# Altium PCB PCB1.PcbDoc
Units mm, origin at the board's own origin, x right, y up, seen from the top; angles counter-clockwise.
Board outline 69.98 x 45.09 mm, 2 copper layers (Top Layer, Bottom Layer); 39 components, 25 nets, 121 pads, 26 vias.
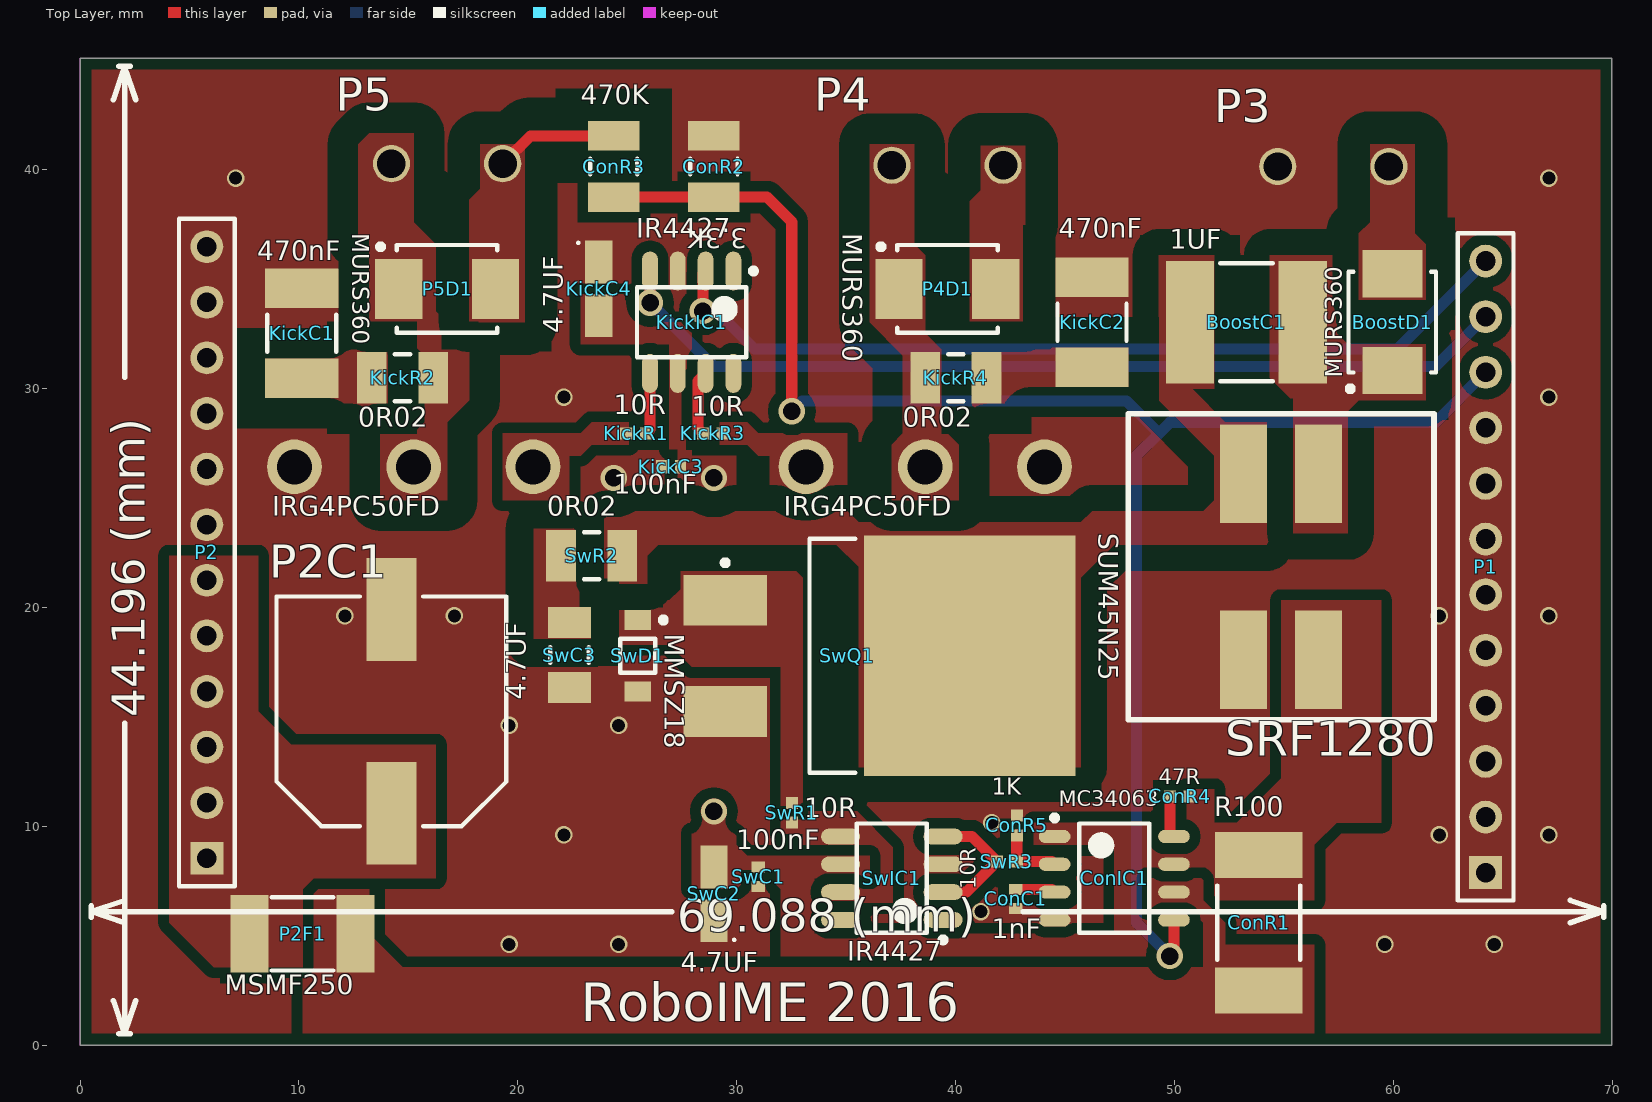
[diagram p0: Top Layer view]
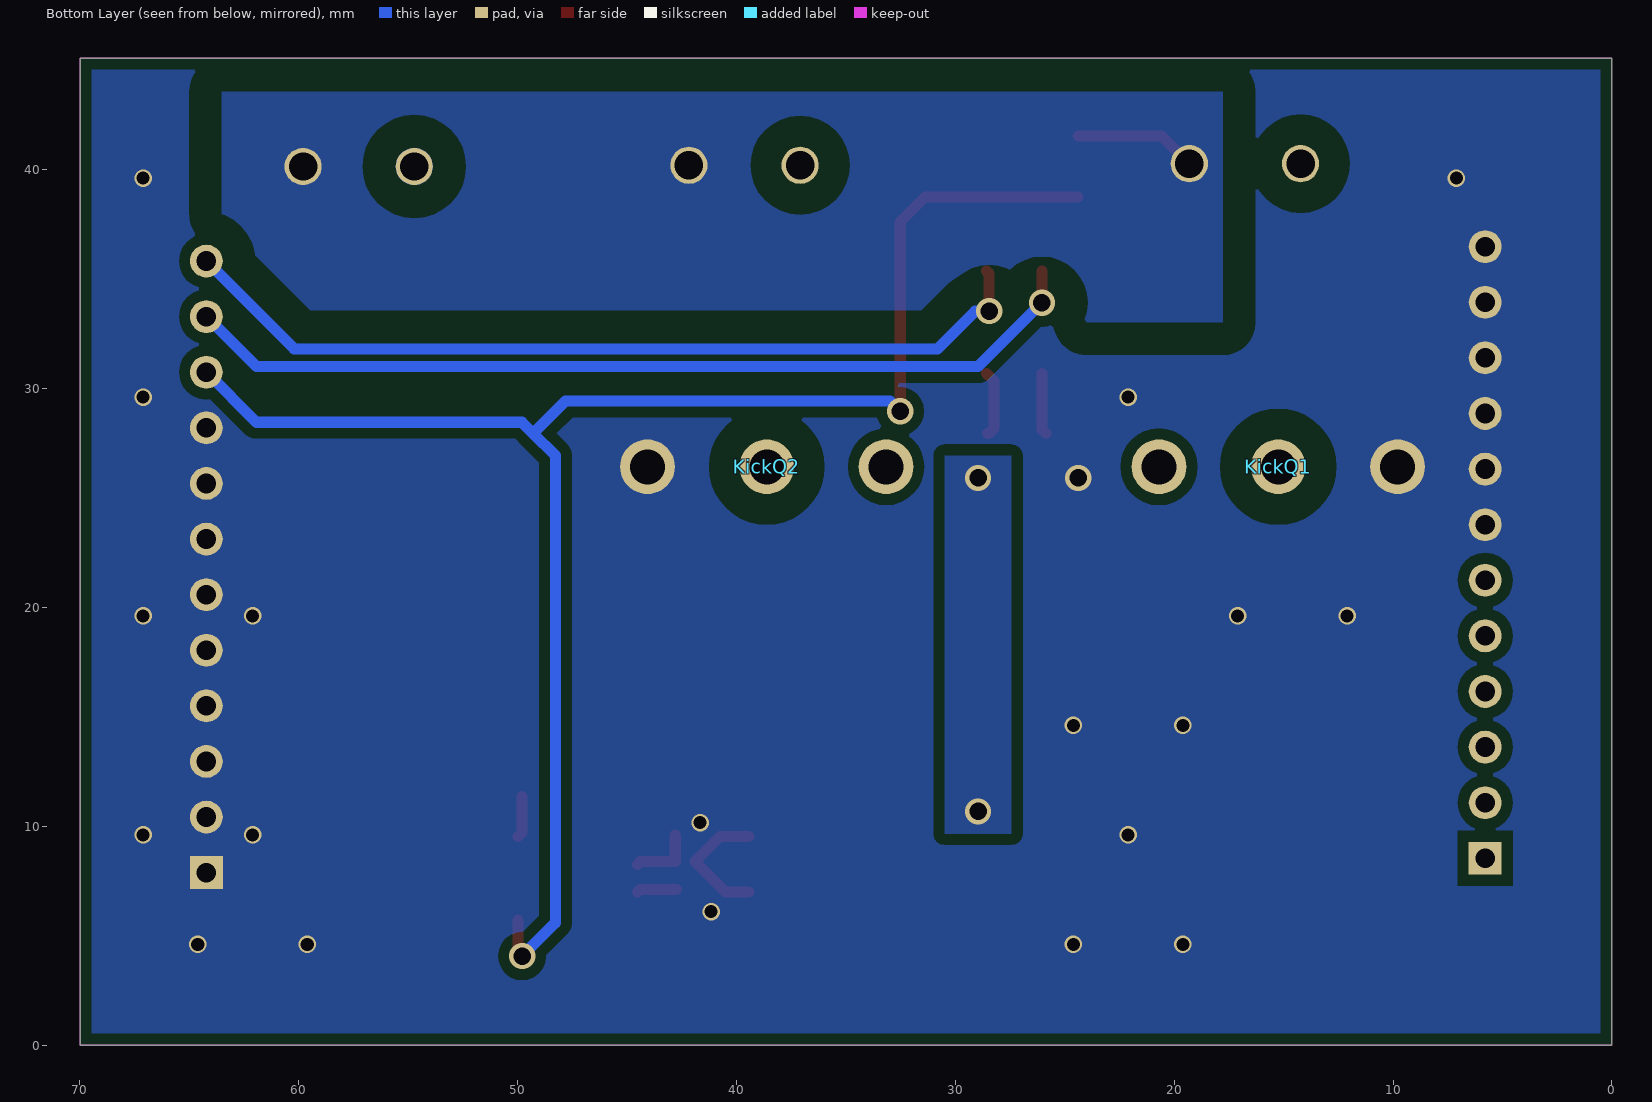
[diagram p1: Bottom Layer view, seen from below]

## Layer stack, top to bottom
Top Solder: solder mask 0.0102, Solder Resist, Dk 3.5
Top Layer: signal copper 0.0356
Dielectric 1: dielectric 0.32, FR-4, Dk 4.8
Bottom Layer: signal copper 0.0356
Bottom Solder: solder mask 0.0102, Solder Resist, Dk 3.5

## Board outline
0,0 69.977,0 69.977,45.085 0,45.085

## Design rules (kind name [scope] priority, off if disabled: settings)
Clearance Clearance_9 [InNet('KICK_REF')] p1: gap=0.5 ignorepadtopadclearanceinfootprint=FALSE except(0: Arc-Hole Track-Hole SMDPad-Hole THPad-Hole Via-Hole Fill-Hole Poly-Hole Region-Hole Text-Hole)
Clearance Clearance_8 [InNet('NetKickC2_2')] p2: gap=1.4 ignorepadtopadclearanceinfootprint=FALSE except(0: Arc-Hole Track-Hole SMDPad-Hole THPad-Hole Via-Hole Fill-Hole Poly-Hole Region-Hole Text-Hole)
Clearance Clearance_7 [InNet('NetKickC1_2')] p3: gap=1.4 ignorepadtopadclearanceinfootprint=FALSE except(0: Arc-Hole Track-Hole SMDPad-Hole THPad-Hole Via-Hole Fill-Hole Poly-Hole Region-Hole Text-Hole)
Clearance Clearance_6 [InNet('CHIP_KICK-')] p4: gap=1.4 ignorepadtopadclearanceinfootprint=FALSE except(0: Arc-Hole Track-Hole SMDPad-Hole THPad-Hole Via-Hole Fill-Hole Poly-Hole Region-Hole Text-Hole)
Clearance Clearance_5 [InNet('KICK-')] p5: gap=1.4 ignorepadtopadclearanceinfootprint=FALSE except(0: Arc-Hole Track-Hole SMDPad-Hole THPad-Hole Via-Hole Fill-Hole Poly-Hole Region-Hole Text-Hole)
Clearance Clearance_4 [InNet('NetSwC3_2')] p6: gap=1.3 ignorepadtopadclearanceinfootprint=FALSE except(0: Arc-Hole Track-Hole SMDPad-Hole THPad-Hole Via-Hole Fill-Hole Poly-Hole Region-Hole Text-Hole)
Clearance Clearance_3 [InNet('NetBoostC1_1')] p7: gap=1.2 ignorepadtopadclearanceinfootprint=FALSE except(0: Arc-Hole Track-Hole SMDPad-Hole THPad-Hole Via-Hole Fill-Hole Poly-Hole Region-Hole Text-Hole)
Clearance Clearance_2 [InNet('SEPIC')] p8: gap=1.2 ignorepadtopadclearanceinfootprint=FALSE except(0: Arc-Hole Track-Hole SMDPad-Hole THPad-Hole Via-Hole Fill-Hole Poly-Hole Region-Hole Text-Hole)
Clearance [InNet('CAP+')] p9: gap=1.5 ignorepadtopadclearanceinfootprint=FALSE except(0: Arc-Hole Track-Hole SMDPad-Hole THPad-Hole Via-Hole Fill-Hole Poly-Hole Region-Hole Text-Hole)
Clearance Clearance_1 [All] p10: gap=0.3 ignorepadtopadclearanceinfootprint=FALSE except(0: Arc-Hole Track-Hole SMDPad-Hole THPad-Hole Via-Hole Fill-Hole Poly-Hole Region-Hole Text-Hole; 0.5: Arc-Poly Track-Poly SMDPad-Poly THPad-Poly Via-Poly Fill-Poly Poly-Poly Poly-Region Poly-Text)
MinimumSolderMaskSliver [All] p1 off: minsoldermaskwidth=0.254
PolygonConnect PolygonConnect_1 [InNetClass('DIRECT')] p1: connectstyle=Direct reliefconductorwidth=0.254 reliefentries=4 polygonreliefangle="90 Angle" airgapwidth=0.254
PolygonConnect [All] p2: connectstyle=Direct reliefconductorwidth=0.508 reliefentries=4 polygonreliefangle="90 Angle" airgapwidth=0.3
RoutingVias [All] p1: holewidth=0.711 width=1.27 viastyle="Through Hole" minholewidth=0.711 minwidth=1.27 maxholewidth=0.711 maxwidth=1.27
SilkToSilkClearance [All] p1 off: silktosilkclearance=0.254
SilkToSolderMaskClearance [IsPad] p1 off: minsilkscreentomaskgap=0.254 clearancetoexposedcopper=TRUE
SolderMaskExpansion [All] p1: expansion=0.102
Width [All] p1: maxlimit=0.762 minlimit=0.254 preferedwidth=0.508
27 further rules are at their usual default settings.

## Classes and differential pairs
net class DIRECT: CAP+ CHIP_KICK- GND KICK- NetBoostC1_1 NetP2_1 NetSwC3_2 SEPIC V+ VIN

## Components (designator, comment, footprint, x,y, rotation, side; value= is the part's Value field where it differs from the comment)
BoostC1 "1UF" CAP-2220 53.28,33.02 r0 top
BoostD1 "MURS360" ONSC-SMB-2-403A-03_V 59.944,33.02 r90 top
ConC1 "1nF" CAP-0402 42.74,6.672 r90 top
ConIC1 "MC34063" SOIC8-STM 47.244,7.62 r0 top
ConR1 "R100" "RES-2512 BOURNS CRA" 53.848,5.588 r270 top
ConR2 "3.3K" RES-1206 28.956,40.132 r270 top
ConR3 "470K" RES-1206 24.384,40.132 r90 top
ConR4 "47R" RES-0402 50.234,11.354 r0 top
ConR5 "1K" RES-0402 42.79,10.031 r270 top
KickC1 "470nF" "CAP-1812 TDK" 10.128,32.512 r270 top
KickC2 "470nF" "CAP-1812 TDK" 46.228,33.02 r270 top
KickC3 "100nF" CAP-0402 26.992,26.416 r0 top
KickC4 "4.7UF" "CAP Tant 1206 Kemet" 23.686,34.544 r90 top
KickIC1 "IR4427" SOIC8-INFINEON 27.94,33.02 r270 top
KickQ1 "IRG4PC50FD" TO-247AC 15.24,26.416 r180 bottom
KickQ2 "IRG4PC50FD" TO-247AC 38.608,26.416 r0 bottom
KickR1 "10R" RES-0402 25.4,27.94 r180 top
KickR2 "0R02" RES-1206 14.732,30.48 r0 top
KickR3 "10R" RES-0402 28.898,27.94 r0 top
KickR4 "0R02" RES-1206 40.008,30.48 r180 top
P1 "Header 12" HDR1X12 64.21,7.874 r90 top
P2 "Header 12" HDR1X12 5.79,8.53 r90 top
P2C1 "EEE-FK1C681GP" "Cap Al Size G - Panasonic" 14.224,15.24 r90 top
P2F1 "MSMF250" "1812-MSMF Bourns2" 10.16,5.08 r0 top
P3 "Cap" "Term Block 2P" 57.252,40.132 r0 top
P4 "OSTTA024163" "Term Block 2P" 39.624,40.189 r0 top
P4D1 "MURS360" ONSC-SMB-2-403A-03_V 39.624,34.544 r0 top
P5 "OSTTA024163" "Term Block 2P" 16.764,40.263 r0 top
P5D1 "MURS360" ONSC-SMB-2-403A-03_V 16.764,34.544 r0 top
SRF1280 "SRF1280-100M" SRF1280-100M-PCB 54.864,21.844 r180 top
SwC1 "100nF" CAP-0402 30.988,7.688 r90 top
SwC2 "4.7UF" "CAP Tant 1206 Kemet" 28.956,6.903 r270 top
SwC3 "4.7UF" "CAP-1206 KEMET" 22.352,17.814 r90 top
SwD1 "MMSZ18" ONSC-SOD-123-2-425-04_V 25.481,17.78 r270 top
SwIC1 "IR4427" SOIC8-INFINEON 37.084,7.62 r180 top
SwQ1 "SUM45N25" "TO-263 Vishay" 35.72,17.78 r0 top
SwR1 "10R" RES-0402 32.512,10.61 r90 top
SwR2 "0R02" RES-1206 23.368,22.352 r0 top
SwR3 "10R" RES-0402 42.34,8.376 r180 top

## Footprints (in the part's own frame and the unit in brackets; to place one, negate y for a bottom-side part, rotate by r counter-clockwise, add the part's x,y. Pads: shape width x height; smd on the part's side, far side on the other; paste and mask are expansions set on the pad)
"1812-MSMF Bourns2" [mm] "Chip Diode, 2-Leads, Body 4,60x3,24mm, IPC Medium Density"
  rect 1.73x3.55 smd: 1(-2.415,0) 2(2.415,0)
  silkscreen extent -1.4,-1.68 1.4,1.68, body extent -2.3,-1.62 2.3,1.62, height 1.15
"Cap Al Size G - Panasonic" [mm] "Aluminum Electrolytic Capacitor, Body 10,30x10,30x10,50mm, IPC Low Density"
  rect 4.7x2.3 smd: 1(-4.65,0) 2(4.65,0)
  silkscreen extent -5.25,-5.25 5.25,5.25, body extent -5.65,-5.21 5.65,5.09, height 10.41
"CAP Tant 1206 Kemet" [mm] "Molded Capacitor, 2-Leads, Body 3,20x1,60mm, IPC Medium Density"
  rect 1.95x1.25 smd: 1(-1.225,0) 2(1.225,0)
  silkscreen extent 2.05,0.87 2.15,0.97, body extent -1.7,-0.9 1.7,0.9, height 1.8
CAP-0402 [mm]
  rect 0.5x0.62 smd: 1(-0.44,0) 2(0.44,0)
  body extent -0.53,-0.28 0.53,0.27, height 0.55
"CAP-1206 KEMET" [mm] "Chip Resistor, 2-Leads, Body 3,20x1,60mm, IPC Medium Density"
  rect 1.42x1.96 smd: 1(-1.49,0) 2(1.49,0)
  silkscreen extent -0.35,-0.88 0.35,0.88, body extent -1.7,-0.9 1.7,0.9, height 1.75
"CAP-1812 TDK" [mm] "Chip Capacitor, 2-Leads, Body 4,60x3,20mm, IPC Medium Density"
  rect 1.8x3.35 smd: 1(-2.05,0) 2(2.05,0)
  silkscreen extent -0.85,-1.58 0.85,1.58, body extent -2.3,-1.6 2.3,1.6, height 3.2
CAP-2220 [mm] "Chip Capacitor, 2-Leads, Body 5,75x5,00mm, IPC Medium Density"
  rect 2.2x5.6 smd: 1(-2.575,0) 2(2.575,0)
  silkscreen extent -1.2,-2.7 1.2,2.7, body extent -3.1,-2.7 3.1,2.7, height 2.5
HDR1X12 [mm] "Connector; Header; 12 Position"
  rect 1.5x1.5 hole 0.9: 1(0,0)
  round 1.5 hole 0.9: 2(2.54,0) 3(5.08,0) 4(7.62,0) 5(10.16,0) 6(12.7,0) 7(15.24,0) 8(17.78,0) 9(20.32,0) 10(22.86,0) 11(25.4,0) 12(27.94,0)
  silkscreen extent -1.27,-1.27 29.21,1.27
ONSC-SMB-2-403A-03_V [mm] "Molded, 2-Leads, Body 4.6x3.95mm"
  rect 2.159x2.743 smd: 1(-2.21,0) 2(2.21,0)
  silkscreen extent -3.16,-2 2.3,2.05, body extent -2.3,-1.97 2.3,1.97, height 2.47
ONSC-SOD-123-2-425-04_V [mm] "SOD, 2-Leads, Body 2.69x1.6mm"
  rect 0.91x1.22 smd: 1(-1.635,0) 2(1.635,0)
  silkscreen extent -1.76,-0.8 0.78,1.29, body extent -1.35,-0.8 1.35,0.8, height 1.35
RES-0402 [mm]
  rect 0.55x0.55 smd: 1(-0.45,0) 2(0.45,0)
  body extent -0.53,-0.27 0.53,0.28, height 0.4
RES-1206 [mm]
  rect 1.35x2.35 smd: 1(-1.4,0) 2(1.4,0)
  silkscreen extent -0.35,-1.08 0.35,1.07, body extent -1.73,-0.67 1.73,0.67, height 0.45
"RES-2512 BOURNS CRA" [mm] "Chip Resistor, 2-Leads, Body 6,45x3,35mm, IPC Medium Density"
  rect 2.1x4 smd: 1(-3.1,0) 2(3.1,0)
  silkscreen extent -1.7,-1.9 1.7,1.9, body extent -3.32,-1.57 3.33,1.58, height 0.9
SOIC8-INFINEON [mm] "SOIC, 8-Leads, Body 4,89x3,90mm, Pitch 1,27mm, IPC Medium Density"
  oval 1.78x0.72 smd: 1(-2.34,1.905) 2(-2.34,0.635) 3(-2.34,-0.635) 4(-2.34,-1.905) 5(2.34,-1.905) 6(2.34,-0.635) 7(2.34,0.635) 8(2.34,1.905)
  silkscreen extent -2.46,-2.5 1.6,2.94, body extent -2,-2.5 2,2.5, height 1.75
SOIC8-STM [mm] "SOIC, 8-Leads, Body 4,90x3,90mm, Pitch 1,27mm, IPC Medium Density"
  oval 1.45x0.6 smd: 1(-2.725,1.905) 2(-2.725,0.635) 3(-2.725,-0.635) 4(-2.725,-1.905) 5(2.725,-1.905) 6(2.725,-0.635) 7(2.725,0.635) 8(2.725,1.905)
  silkscreen extent -2.85,-2.5 1.6,2.88, body extent -2,-2.5 2,2.5, height 1.75
SRF1280-100M-PCB [mm]
  rect 2.15x4.5 smd: 1(1.715,4.25) 2(-1.715,4.25) 3(-1.715,-4.25) 4(1.715,-4.25)
  silkscreen extent -6.99,-6.99 6.99,6.99, body extent -6.25,-6.12 6.25,6.38, height 7.8
"Term Block 2P" [mm]
  round 1.7 hole 1.3: 1(-2.54,0) 2(2.54,0)
  body extent -5.64,-3.1 4.96,4.5, height 10
TO-247AC [mm]
  round 2.5 hole 1.6: 1(-5.45,0) 2(0,0) 3(5.45,0)
  body extent -7.75,-24.89 7.75,0.51, height 8
"TO-263 Vishay" [mm] "D2-PAK, 3-Pads, Body 7,93x8,69mm (max), IPC Medium Density"
  rect 3.81x2.32 smd: 1(-6.25,2.54) 3(-6.25,-2.54)
  rect 9.65x11 smd: 2(4.92,0)
  silkscreen extent -6.37,-5.35 -0.31,5.35, body extent -6.5,-4.91 8.09,4.91, height 4.22

## Part data
BoostC1: library part "Cap 1UF 2220 450V", "1µF 450V Ceramic Capacitor X7T 2220 (5750 Metric) 0.224\" L x 0.197\" W (5.70mm x 5.00mm)"
BoostD1 P4D1 P5D1: library part CMP-0902-00327-1, "Surface Mount Ultrafast Power Rectifier, 2-Pin SMB, Pb-Free, Tape and Reel"
ConC1: library part "Cap 1nF 0402", "1000pF 50V Ceramic Capacitor X7R 0402 (1005 Metric) 0.039\" L x 0.020\" W (1.00mm x 0.50mm)"
ConIC1: library part MC34063ACD, "Buck, Boost Switching Regulator IC Positive or Negative Adjustable 1.25V 1 Output 1.5A (Switch) 8-SOIC (0.154\", 3.90mm Width)"
ConR1: library part "RES 0R1 2512", "RES SMD 0.1 OHM 1% 3W 2512"
ConR2: library part "RES 3.3K 1206", "RES SMD 3.3K OHM 5% 1/4W 1206"
ConR3: library part "RES 470K 1206", "RES SMD 470K OHM 1% 1/4W 1206"
ConR4: library part "RES 47 0402", "RES SMD 47 OHM 5% 1/16W 0402"
ConR5: library part "RES 1K 0402", "RES SMD 1K OHM 5% 1/16W 0402"
KickC1 KickC2: library part "Cap 470nF 250V 1812", "0.47µF 250V Ceramic Capacitor X7R 1812 (4532 Metric) 0.177\" L x 0.126\" W (4.50mm x 3.20mm)"
KickC3 SwC1: library part "Cap 100nF 0402", "0.10µF 16V Ceramic Capacitor X7R 0402 (1005 Metric) 0.039\" L x 0.020\" W (1.00mm x 0.50mm)"
KickC4 SwC2: library part "Cap Tant 4,7UF 1206", "4.7µF Molded Tantalum Capacitors 25V 1206 (3216 Metric) 6 Ohm 0.126\" L x 0.063\" W (3.20mm x 1.60mm)"
KickIC1 SwIC1: "IC DRIVER DUAL LOW SIDE 8SOIC"
KickQ1 KickQ2: "IGBT 600V 70A 200W TO247AD"
KickR1 KickR3 SwR1 SwR3: library part "RES 10 0402", "RES SMD 10 OHM 5% 1/16W 0402"
KickR2 KickR4 SwR2: library part "RES 0R02 1206", "RES SMD 0.02 OHM 1% 1/4W 1206"
P1 P2: "Header, 12-Pin"
P2C1: library part "CAP AL 680UF/16V", "Aluminum Electrolytic Capacitors - SMD Al Lytic Cap SMT FK Series 105C"
P2F1: library part MF-MSMF250/16X, "PTC RESETTABLE"
P3 P4 P5: library part "Term Block 2P", "2 Position Wire to Board Terminal Block Horizontal with Board 0.200\" (5.08mm) Through Hole"
SRF1280: "Shielded 2 Coil Inductor Array 40µH Inductance - Connected in Series 10µH Inductance - Connected in Parallel 24.1 mOhm Max DC Resistance (DCR) - Parallel 6.04A Nonstandard"
SwC3: library part "Cap 470nF 50V 1206", "0.47µF 50V Ceramic Capacitor X8L 1206 (3216 Metric) 0.126\" L x 0.063\" W (3.20mm x 1.60mm)"
SwD1: library part CMP-1060-00279-1, "Zener Voltage Regulator, 500 mW, 2-Pin SOD-123, Pb-Free, Tape and Reel"
SwQ1: "MOSFET N-CH 250V 45A D2PAK"

## Via types
v1: diameter 0.8, hole 0.6, Top Layer to Bottom Layer, 19 vias
v2: diameter 1.2, hole 0.8, Top Layer to Bottom Layer, 7 vias

## Nets (pads, with @x,y where several pads share a name; then routed paths per layer and width w, separated by ;. In a path a pad name is that pad's centre, name@x,y a point inside that pad or via, vN(x,y) a via of type N, cw(c..) or ccw(c..) an arc to the next point about the centre after c; other vN are vias at no path point)
CAP+: BoostD1.2 ConR3.2 P3.2 P4.2 P4D1.2 P5.2 P5D1.2 | length 5.8
  Top Layer w0.508: P5.2@19.435,40.132 P5.2 20.573,41.532 ConR3.2
CHIP_KICK: KickIC1.2 P1.12 | length 40
  Top Layer w0.508: v2(28.448,33.528) 28.448,35.233 KickIC1.2
  Bottom Layer w0.508: v2(28.448,33.528) 29.083,33.528 30.815,31.796 60.192,31.796 P1.12
CHIP_KICK-: KickQ1.2 KickR2.2 P5.1 P5D1.1
GND: ConC1.1 ConIC1.4 ConR2.1 ConR5.1 KickC1.1 KickC2.1 KickC3.1 KickC4.2 KickIC1.3 KickQ1.3 KickQ2.3 P1.1 P1.2 P1.3 P1.4 P1.5 P1.6 P1.7 P1.8 P1.9 P2.7 P2.8 P2.9 P2.10 P2.11 P2.12 P2C1.2 P3.1 SRF1280.1 SwC1.1 SwC2.2 SwC3.1 SwD1.2 SwIC1.3 SwQ1.3
  other v1: 19.6,4.6 24.6,4.6 59.6,4.6 64.6,4.6 41.148,6.096 22.1,9.6 62.1,9.6 67.1,9.6 41.656,10.16 19.6,14.6 24.6,14.6 12.1,19.6 17.1,19.6 62.1,19.6 67.1,19.6 22.1,29.6 67.1,29.6 7.1,39.6 67.1,39.6
  other v2: 24.384,25.908
KICK: KickIC1.4 P1.11 | length 41.8
  Top Layer w0.508: v2(26.035,33.909) KickIC1.4
  Bottom Layer w0.508: v2(26.035,33.909) 28.956,30.988 61.924,30.988 P1.11
KICK-: KickQ2.2 KickR4.2 P4.1 P4D1.1
KICK_REF: ConIC1.5 ConR2.2 ConR3.1 P1.10 | length 77.6
  Top Layer w0.508: ConR3.1 ConR2.2 31.372,38.732 32.512,37.592 v2(32.512,28.956) ; v2(49.784,4.064) 49.969,4.249 ConIC1.5
  Bottom Layer w0.508: v2(32.512,28.956) 32.976,29.42 47.796,29.42 49.276,27.94 ; v2(49.784,4.064) 48.26,5.588 48.26,26.924 49.276,27.94 ; P1.10 61.924,28.448 49.784,28.448 49.276,27.94
NetBoostC1_1: BoostC1.1 SRF1280.4 SwQ1.2 SwR2.2
NetConC1_2: ConC1.2 ConIC1.3 | length 1.8
  Top Layer w0.508: ConC1.2 44.392,7.112 ConIC1.3
NetConIC1_8: ConIC1.8 ConR4.1 | length 1.9
  Top Layer w0.508: ConR4.1 49.784,9.71 ConIC1.8
NetKickC1_2: KickC1.2 KickR2.1
NetKickC2_2: KickC2.2 KickR4.1
NetKickIC1_5: KickIC1.5 KickR1.1 | length 2.8
  Top Layer w0.508: KickR1.1 26.035,28.125 KickIC1.5
NetKickIC1_7: KickIC1.7 KickR3.1 | length 3.1
  Top Layer w0.508: KickR3.1@28.519,27.94 KickR3.1 28.219,28.169 28.219,30.324 KickIC1.7
NetKickQ1_1: KickQ1.1 KickR1.2
NetKickQ2_1: KickQ2.1 KickR3.2
NetP2_1: P2.1 P2.2 P2.3 P2.4 P2.5 P2.6 P2C1.1 P2F1.1
NetSwC3_2: SwC3.2 SwR2.1
NetSwD1_1: SwD1.1 SwQ1.1 SwR1.2
NetSwIC1_2: SwIC1.2 SwIC1.4 SwR3.2 | length 6
  Top Layer w0.508: SwIC1.2 40.498,6.985 SwR3.2 40.741,9.525 SwIC1.4
NetSwIC1_5: SwIC1.5 SwIC1.7 SwR1.1
SEPIC: BoostC1.2 BoostD1.1 SRF1280.3
SW_CON: ConIC1.2 ConR5.2 SwR3.1 | length 3
  Top Layer w0.508: ConR5.2 SwR3.1 44.398,8.376 ConIC1.2
V+: ConIC1.1 ConIC1.7 ConR1.1 ConR4.2 KickC3.2 KickC4.1 KickIC1.6 SRF1280.2 SwC1.2 SwC2.1 SwIC1.6
  other v2: 28.956,10.668 28.956,25.908
VIN: ConIC1.6 ConR1.2 P2F1.2
pads on no net: KickIC1.1 KickIC1.8 SwIC1.1 SwIC1.8

## Polygon pours and split planes (outlines as drawn)
NetKickC1_2 on Top Layer "Top Layer-No Net" (solid, remove dead copper, pour order 66): 14.732,32.004 14.732,28.956 12.192,28.956 11.684,29.464 8.128,29.464 8.128,31.496 11.684,31.496 12.192,32.004
NetKickC2_2 on Top Layer "Top Layer-No Net" (solid, remove dead copper, pour order 60): 48.26,32.004 48.26,29.972 43.18,29.972 44.196,29.972 43.18,28.956 40.64,28.956 40.64,32.004
CAP+ on Top Layer "Top Layer-No Net" (solid, remove dead copper, pour order 1): 43.18,41.074 43.18,39.042 43.18,32.946 40.64,32.946 40.64,38.534 41.148,39.042 41.148,41.074
CAP+ on Top Layer "Top Layer-No Net" (solid, remove dead copper, pour order 2): 20.32,41.148 20.32,39.116 20.32,33.02 17.78,33.02 17.78,38.608 18.288,39.116 18.288,41.148
CAP+ on Top Layer "Top Layer-No Net" (solid, remove dead copper, pour order 0): 61.468,34.036 58.42,34.036 58.42,37.084 58.928,37.592 58.928,41.148 60.96,41.148 60.96,37.084 61.468,36.576
KICK- on Top Layer "Top Layer-No Net" (solid, remove dead copper, pour order 3): 36.068,41.148 38.1,41.148 38.1,38.608 38.1,36.576 38.608,36.068 38.608,32.512 39.624,31.496 39.624,27.94 40.132,27.432 40.132,24.892 37.084,24.892 37.084,27.432 37.592,27.94 37.592,28.956 37.592,31.496 36.068,33.02
CHIP_KICK- on Top Layer "Top Layer-No Net" (solid, remove dead copper, pour order 4): 13.716,24.892 16.764,24.892 16.764,28.448 17.78,29.464 17.78,32.004 16.256,33.528 16.256,36.068 16.256,36.576 15.24,37.592 15.24,41.656 13.208,41.656 12.7,41.148 12.7,32.512 14.732,32.512 15.748,31.496 15.748,28.448 15.24,27.94 13.716,27.94
V+ on Top Layer "Top Layer-No Net" (solid, remove dead copper, pour order 46): 26.924,26.924 29.972,26.924 29.972,24.892 27.94,24.892 27.94,25.4 27.432,25.908 26.924,25.908
V+ on Top Layer "Top Layer-No Net" (solid, remove dead copper, pour order 42): 27.94,6.604 29.972,6.604 29.972,11.684 27.94,11.684
NetBoostC1_1 on Top Layer "Top Layer-No Net" (solid, remove dead copper, pour order 11): 54.356,22.86 47.244,22.86 45.72,21.336 45.72,12.7 35.56,12.7 35.56,21.844 34.544,22.86 26.416,22.86 25.908,22.352 25.908,20.828 23.876,20.828 23.876,24.384 35.052,24.384 35.56,23.876 45.72,23.876 46.228,24.384 51.308,24.384 51.816,24.892 51.816,26.924 49.276,29.464 49.276,36.068 51.816,36.068 51.816,29.972 50.8,29.972 52.324,28.448 54.356,28.448
SEPIC on Top Layer "Top Layer-No Net" (solid, remove dead copper, pour order 10): 55.372,23.368 57.912,23.368 57.912,28.956 58.42,29.464 61.468,29.464 61.468,32.004 57.912,32.004 57.404,32.512 57.404,36.068 54.356,36.068 54.356,30.48 55.372,29.464
V+ on Top Layer "Top Layer-No Net" (solid, remove dead copper, pour order 9): 56.388,6.604 56.388,9.144 57.404,10.16 59.436,10.16 59.436,20.32 54.864,20.32 54.864,12.192 52.832,10.16 51.818,10.16 51.818,11.684 50.292,11.684 50.292,10.16 47.244,10.16 43.18,10.16 43.18,9.144 47.244,9.144 47.244,5.08 33.528,5.08 33.528,7.62 36.068,7.62 36.068,8.636 30.48,8.636 29.972,9.144 29.972,9.652 27.94,9.652 27.94,6.604 29.972,6.604 29.972,7.112 30.48,7.62 31.496,7.62 32.004,7.112 32.004,3.556 48.768,3.556 48.768,7.62 51.308,7.62 51.308,6.604
VIN on Top Layer "Top Layer-No Net" (solid, remove dead copper, pour order 8): 10.16,7.112 13.208,7.112 13.208,5.08 14.732,3.556 51.308,3.556 51.308,4.572 51.308,5.588 50.8,6.096 48.768,6.096 48.768,7.62 51.308,7.62 51.308,7.112 51.308,6.604 52.324,5.588 52.324,4.572 53.848,4.572 56.388,4.572 56.388,0.508 10.16,0.508
NetP2_1 on Top Layer "Top Layer-No Net" (solid, remove dead copper, pour order 7): 4.064,22.352 8.128,22.352 8.128,15.24 9.652,13.716 16.256,13.716 16.256,7.62 10.668,7.62 10.16,7.112 10.16,3.556 6.096,3.556 4.064,5.588
NetKickQ1_1 on Top Layer "Top Layer-No Net" (solid, remove dead copper, pour order 24): 19.304,27.94 19.304,24.892 22.352,24.892 22.352,26.924 22.86,26.924 23.368,27.432 24.384,27.432 25.4,27.432 25.4,28.448 23.368,28.448 22.86,27.94
NetSwIC1_5 on Top Layer "Top Layer-No Net" (solid, remove dead copper, pour order 26): 32.004,9.652 32.004,10.668 35.495,10.668 37.13,9.033 37.13,6.493 33.574,6.493 33.574,7.509 35.606,7.509 36.114,8.017 36.114,9.033 33.02,9.033 33.02,9.652
NetSwD1_1 on Top Layer "Top Layer-No Net" (solid, remove dead copper, pour order 28): 24.384,18.288 24.384,20.32 26.924,20.32 27.432,20.828 27.432,21.844 32.512,21.844 33.02,21.336 33.02,10.78 32.004,10.78 32.004,17.272 27.94,17.272 26.924,18.288
NetSwC3_2 on Top Layer "Top Layer-No Net" (solid, remove dead copper, pour order 30): 23.334,18.558 23.334,20.522 22.758,21.098 22.758,24.011 20.726,24.011 20.726,18.558
NetKickQ2_1 on Top Layer "Top Layer-No Net" (solid, remove dead copper, pour order 32): 35.052,27.94 35.052,24.892 31.496,24.892 31.496,26.924 30.988,26.924 30.48,27.432 28.956,27.432 28.956,28.448 30.48,28.448 30.988,27.94
V+ on Top Layer "Top Layer-No Net" (solid, remove dead copper, pour order 34): 27.94,32.004 27.94,25.908 26.924,25.908 26.924,29.464 26.924,32.004 24.892,32.004 22.86,32.004 22.86,34.544 24.892,34.544 24.892,34.036 25.908,33.02 27.94,33.02
GND on Top Layer "Top Layer-No Net" (solid, remove dead copper, pour order 40): 0,46.228 0,0 71.12,0 71.12,46.228
CAP+ on Bottom Layer "Top Layer-No Net" (solid, remove dead copper, pour order 5): 63.5,45.72 63.5,33.02 17.78,33.02 17.78,45.72
V+ on Bottom Layer "Top Layer-No Net" (solid, remove dead copper, pour order 6): 30.48,9.652 27.432,9.652 27.432,26.924 30.48,26.924
GND on Bottom Layer "Top Layer-No Net" (solid, remove dead copper, pour order 38): 0,45.72 0,0 71.12,0 71.12,45.72

## Keep-outs
Keep-Out Layer:
  the board outline again, w0.05

## Silkscreen, mask and mechanical layers (free items; w line width, h text height)
Top Overlay:
  lines w0.254: 0.508,5.842 0.508,6.35 ; 1.524,2.032 2.032,0.508 ; 1.524,43.18 2.032,44.704 ; 1.778,0.508 2.286,0.508 ; 1.778,44.704 2.286,44.704 ; 2.032,5.588 0.508,6.096 ; 2.032,6.604 0.508,6.096 ; 2.032,14.709 2.032,0.508 ; 2.032,30.503 2.032,44.704 ; 2.54,2.032 2.032,0.508 ; 2.54,43.18 2.032,44.704 ; 27.028,6.096 0.508,6.096 ; 43.076,6.096 69.596,6.096 ; 68.072,5.588 69.596,6.096 ; 68.072,6.604 69.596,6.096 ; 69.596,5.842 69.596,6.35
  text "44.196 (mm)" at 2.946,14.963 h1.52 r90
  text "69.088 (mm)" at 27.282,5.182 h1.52
  text "RoboIME 2016" at 22.86,0.508 h3